# EAGLE board NIRGM V8 _support Double (EAGLE 8.5.1)
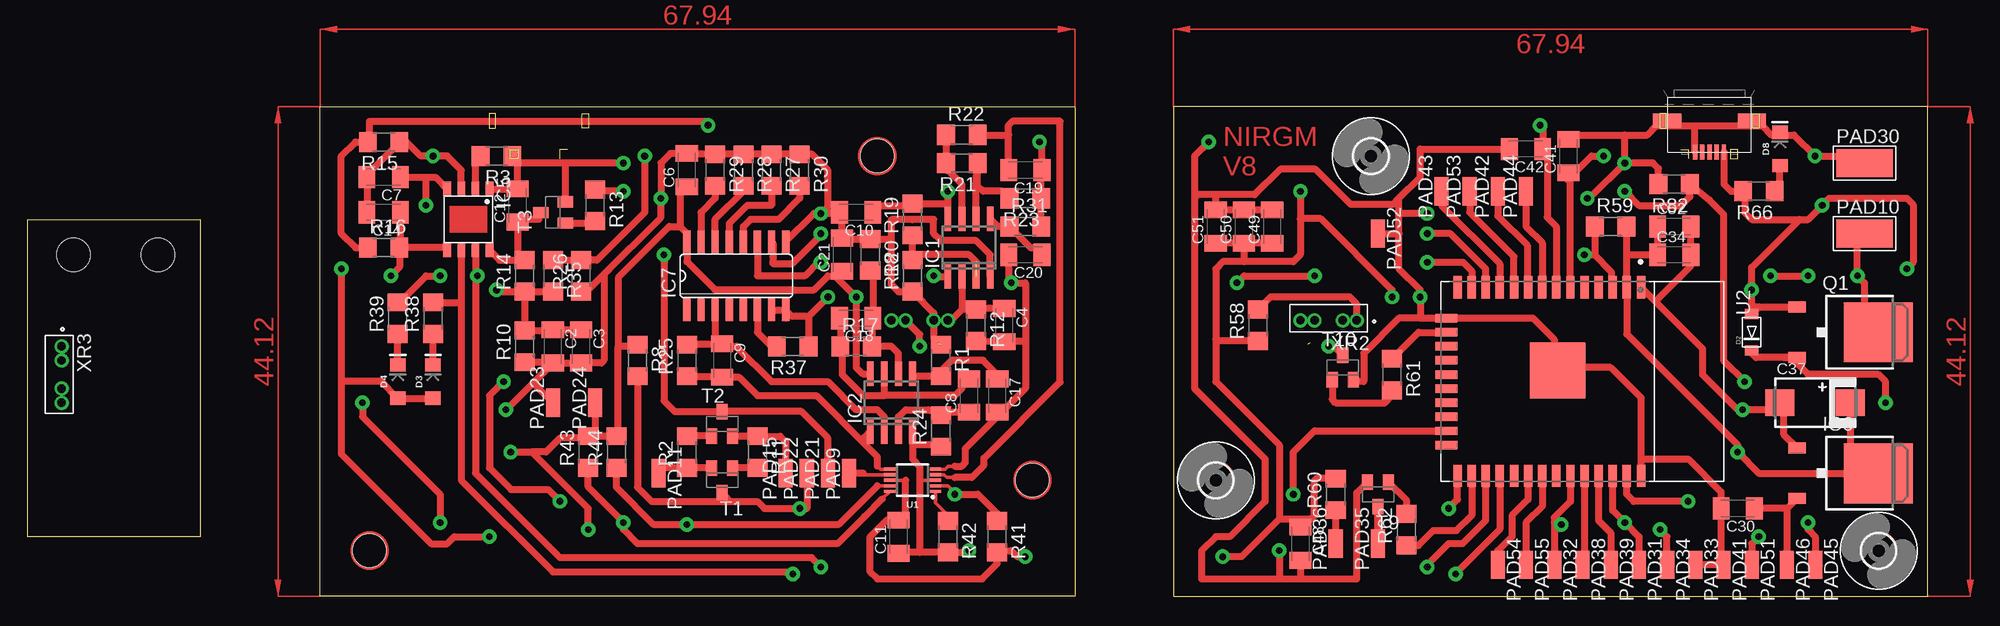
[diagram p0: board, top side]
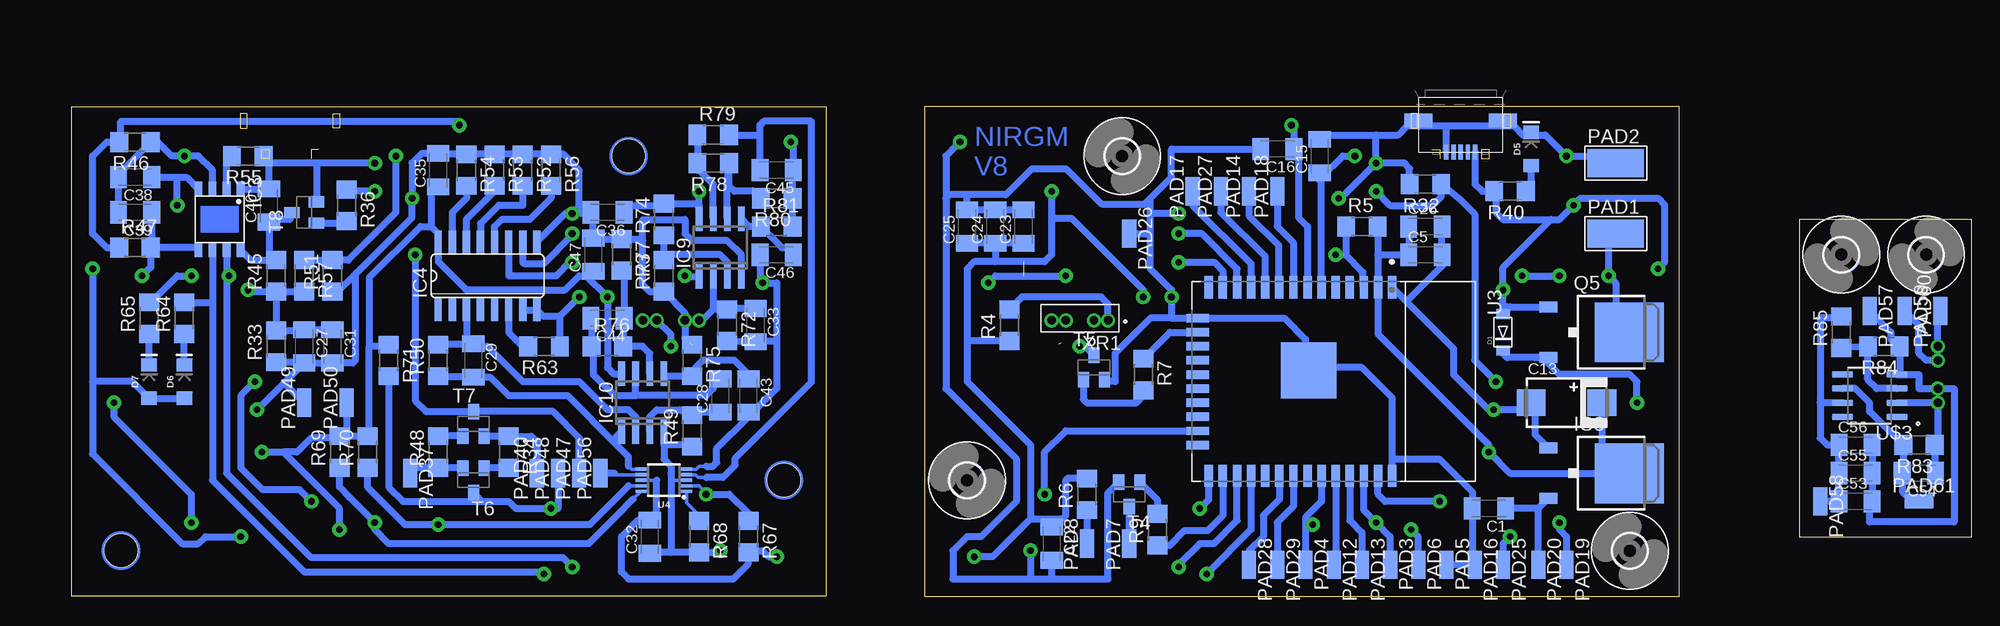
[diagram p1: board, bottom side, seen from below]

Size 171.11 x 44.12 mm. Coordinates in mm from the lower left corner, seen from the top.
Outline: 94.28,44.12 94.28,0 26.35,0 26.35,44.12 94.28,44.12
Outline: 103.17,44.12 103.17,0 171.11,0 171.11,44.12 103.17,44.12
Outline: 15.54,5.38 0,5.38 0,33.95 15.54,33.95 15.54,5.38
Copper layers (1*16): Top 0.035mm / dielectric 1.5mm / Bottom 0.035mm
Design rules "default": minimum track width 6mil, minimum drill 0.35mm, track to track 6mil, track to pad 6mil, pad to pad 6mil, via to via 6mil, smd to smd 6mil, copper to edge 40mil, drill to drill 6mil, minimum pad ring 10mil, minimum via ring 8mil, stop-mask expansion 4mil, vias tented up to drill 0mil, thermal gap 10mil

## Footprints (pad centres in the part's own frame; a part is rotated, then mirrored left to right if it is on the bottom)
C1206K = smd 1.5 x 2: 1 -1.5,0; 2 1.5,0
7343/T = smd 2.6 x 2.4: + 3.175,0; - -3.175,0
SOD-123FL = smd 0.91 x 1.22: A 1.637,0; C -1.637,0
LED-1206 = smd 1.2 x 1.4: A -1.5,0; C 1.5,0
3,0 = hole 3: 0,0
SO08 = smd 0.6 x 2.2: 1 -1.905,-2.6; 2 -0.635,-2.6; 3 0.635,-2.6; 4 1.905,-2.6; 5 1.905,2.6; 6 0.635,2.6; 7 -0.635,2.6; 8 -1.905,2.6
SOP-8 = smd 1.3 x 0.7: 1 -2.75,1.905; 2 -2.75,0.635; 3 -2.75,-0.635; 4 -2.75,-1.905; 5 2.75,-1.905; 6 2.75,-0.635; 7 2.75,0.635; 8 2.75,1.905
SO16 = smd 0.66 x 2.032: 1 -4.445,-3.073; 2 -3.175,-3.073; 3 -1.905,-3.073; 4 -0.635,-3.073; 5 0.635,-3.073; 6 1.905,-3.073; 7 3.175,-3.073; 8 4.445,-3.073; 9 4.445,3.073; 10 3.175,3.073; 11 1.905,3.073; 12 0.635,3.073; 13 -0.635,3.073; 14 -1.905,3.073; 15 -3.175,3.073; 16 -4.445,3.073
TO252 = smd 1 x 1.6: 1 -2.28,-6.07; 2 2.28,-6.07 | smd 5.4 x 6.2: 3 0,1.23
5-2,5 = smd 2.54 x 5.08: 1 0,0
SMD1,27-2,54 = smd 1.27 x 2.54: 1 0,0
TO252' = smd 1 x 1.6: 1 -2.28,-4.8; 2 2.28,-4.8 | smd 5.4 x 6.2: 3 0,2.5
R1206 = smd 1.6 x 1.803: 1 -1.422,0; 2 1.422,0
SOT23 = smd 1 x 1.4: 1 -0.95,-1.1; 2 0.95,-1.1; 3 0,1.1
MSOP10 = smd 0.3 x 1: 1 -1,-2.05; 2 -0.5,-2.05; 3 0,-2.05; 4 0.5,-2.05; 5 1,-2.05; 6 1,2.05; 7 0.5,2.05; 8 0,2.05; 9 -0.5,2.05; 10 -1,2.05
MODULE_ESP32-WROOM-32D = smd 2 x 0.762: 1 -8.5,5.26; 2 -8.5,3.99; 3 -8.5,2.72; 4 -8.5,1.45; 5 -8.5,0.18; 6 -8.5,-1.09; 7 -8.5,-2.36; 8 -8.5,-3.63; 9 -8.5,-4.9; 10 -8.5,-6.17; 11 -8.5,-7.44; 12 -8.5,-8.71; 13 -8.5,-9.98; 14 -8.5,-11.25; 25 8.5,-11.25; 26 8.5,-9.98; 27 8.5,-8.71; 28 8.5,-7.44; 29 8.5,-6.17; 30 8.5,-4.9; 31 8.5,-3.63; 32 8.5,-2.36; 33 8.5,-1.09; 34 8.5,0.18; 35 8.5,1.45; 36 8.5,2.72; 37 8.5,3.99; 38 8.5,5.26 | smd 0.762 x 2: 15 -5.715,-12.25; 16 -4.445,-12.25; 17 -3.175,-12.25; 18 -1.905,-12.25; 19 -0.635,-12.25; 20 0.635,-12.25; 21 1.905,-12.25; 22 3.175,-12.25; 23 4.445,-12.25; 24 5.715,-12.25 | smd 5 x 5: 39 -1,-2.24
47589-0001 = smd 1.35 x 0.4: 1 2.8,1.3; 2 2.8,0.65; 3 2.8,0; 4 2.8,-0.65; 5 2.8,-1.3 | smd 1.27 x 2.54: P$1 0,3.81; P$2 0,-3.81
SOIC127P600X175-8N = smd 1.9 x 0.6: 1 -2.455,1.905; 2 -2.455,0.635; 3 -2.455,-0.635; 4 -2.455,-1.905; 5 2.455,-1.905; 6 2.455,-0.635; 7 2.455,0.635; 8 2.455,1.905
XDCR_TCRT1000 = drill 0.75 pad 1.1: A -2.54,0.2; CATH -1.27,0.2; COLL 2.54,0.2; E 1.27,0.2

## Placement (x,y rotation side)
C1  10uf  [C1206K]  43.48,7.93 180 bottom
C2  100nf  [C1206K]  47.3,22.53 270 top
C3  10uf  [C1206K]  49.83,22.53 270 top
C4  5.7pf  [C1206K]  87.94,24.44 270 top
C5  100nf  [C1206K]  49.2,30.79 0 bottom
C6  100nf  [C1206K]  59.36,38.41 90 top
C7  10uf  [C1206K]  32.05,37.77 180 top
C8  10uf  [C1206K]  84.76,18.09 90 top
C9  100nf  [C1206K]  62.53,21.26 270 top
C10  100nf  [C1206K]  74.6,34.59 180 top
C11  1uf  [C1206K]  78.41,5.38 90 top
C12  10uf  [C1206K]  44.12,35.23 90 top
C13  220uf  [7343/T]  36.5,17.45 0 bottom
C14  10uf  [C1206K]  32.05,34.59 180 top
C15  100nf  [C1206K]  58.73,39.68 90 bottom
C16  100nf  [C1206K]  62.53,40.31 180 bottom
C17  10uf  [C1206K]  87.3,18.09 270 top
C18  100nf  [C1206K]  74.6,25.07 180 top
C19  100nF  [C1206K]  89.84,38.41 180 top
C20  1uF  [C1206K]  89.84,30.79 180 top
C21  100nf  [C1206K]  73.33,30.79 90 top
C22  100nf  [C1206K]  82.85,4.75 270 bottom
C23  100nf  [C1206K]  85.39,33.33 90 bottom
C24  10uf  [C1206K]  87.94,33.33 90 bottom
C25  10uf  [C1206K]  90.47,33.33 90 bottom
C26  10uf  [C1206K]  49.2,33.33 0 bottom
C27  100nf  [C1206K]  150.16,22.53 270 bottom
C28  10uf  [C1206K]  112.7,18.09 90 bottom
C29  100nf  [C1206K]  134.93,21.26 270 bottom
C30  10uf  [C1206K]  153.98,7.93 180 top
C31  10uf  [C1206K]  147.62,22.53 270 bottom
C32  1uf  [C1206K]  119.05,5.38 90 bottom
C33  5.7pf  [C1206K]  109.52,24.44 270 bottom
C34  100nf  [C1206K]  148.26,30.79 0 top
C35  100nf  [C1206K]  138.1,38.41 90 bottom
C36  100nf  [C1206K]  122.86,34.59 180 bottom
C37  220uf  [7343/T]  160.96,17.45 0 top
C38  10uf  [C1206K]  165.4,37.77 180 bottom
C39  10uf  [C1206K]  165.4,34.59 180 bottom
C40  10uf  [C1206K]  153.34,35.23 90 bottom
C41  100nf  [C1206K]  138.74,39.68 90 top
C42  100nf  [C1206K]  134.93,40.31 180 top
C43  10uf  [C1206K]  110.16,18.09 270 bottom
C44  100nf  [C1206K]  122.86,25.07 180 bottom
C45  100nF  [C1206K]  107.62,38.41 180 bottom
C46  1uF  [C1206K]  107.62,30.79 180 bottom
C47  100nf  [C1206K]  124.13,30.79 90 bottom
C48  100nf  [C1206K]  114.61,4.75 270 top
C49  100nf  [C1206K]  112.06,33.33 90 top
C50  10uf  [C1206K]  109.52,33.33 90 top
C51  10uf  [C1206K]  106.98,33.33 90 top
C52  10uf  [C1206K]  148.26,33.33 0 top
C53  100nf  [C1206K]  10.46,8.56 0 bottom
C54  5.7pf  [C1206K]  4.75,11.1 180 bottom
C55  10uF  [C1206K]  10.46,11.1 0 bottom
C56  10uF  [C1206K]  10.46,13.64 0 bottom
D1  SOD4007  [SOD-123FL]  42.22,23.8 90 bottom
D2  SOD4007  [SOD-123FL]  155.25,23.8 90 top
D3  GREEN  [LED-1206]  36.5,19.36 90 top
D4  RED  [LED-1206]  33.32,19.36 90 top
D5  RED  [LED-1206]  39.67,40.31 90 bottom
D6  GREEN  [LED-1206]  160.96,19.36 90 bottom
D7  RED  [LED-1206]  164.13,19.36 90 bottom
D8  RED  [LED-1206]  157.79,40.31 90 top
H1  MOUNT-HOLE3.0  [3,0]  30.78,4.12 270 bottom
H2  MOUNT-HOLE3.0  [3,0]  76.5,39.68 270 bottom
H3  MOUNT-HOLE3.0  [3,0]  90.47,10.46 270 bottom
H4  MOUNT-HOLE3.0  [3,0]  166.68,4.12 270 top
H5  MOUNT-HOLE3.0  [3,0]  106.98,10.46 270 top
H6  MOUNT-HOLE3.0  [3,0]  120.95,39.68 270 top
H7  MOUNT-HOLE3.0  [3,0]  11.73,30.79 0 bottom
H8  MOUNT-HOLE3.0  [3,0]  4.11,30.79 0 bottom
IC1  MCP602SN  [SO08]  84.76,31.42 0 top
IC2  MCP602SN  [SO08]  77.78,17.45 0 top
IC3  TP4056  [SOP-8]  157.79,33.96 270 bottom
IC4  4051D  [SO16]  133.66,28.88 0 bottom
IC5  TP4056  [SOP-8]  39.67,33.96 270 top
IC6  3.3v  [TO252]  165.4,11.1 270 top
IC7  4051D  [SO16]  63.8,28.88 0 top
IC8  3.3v  [TO252]  32.05,11.1 270 bottom
IC9  MCP602SN  [SO08]  112.7,31.42 0 bottom
IC10  MCP602SN  [SO08]  119.69,17.45 0 bottom
PAD1  [5-2,5]  32.05,32.69 270 bottom
PAD2  [5-2,5]  32.05,39.04 270 bottom
PAD3  [SMD1,27-2,54]  52.38,2.84 180 bottom
PAD4  [SMD1,27-2,54]  59.99,2.84 180 bottom
PAD5  [SMD1,27-2,54]  47.3,2.84 180 bottom
PAD6  [SMD1,27-2,54]  49.83,2.84 180 bottom
PAD7  [SMD1,27-2,54]  75.87,4.75 0 bottom
PAD8  [SMD1,27-2,54]  79.68,4.75 0 bottom
PAD9  [SMD1,27-2,54]  73.97,11.1 0 top
PAD10  [5-2,5]  165.4,32.69 270 top
PAD11  [SMD1,27-2,54]  56.82,11.1 180 top
PAD12  [SMD1,27-2,54]  57.45,2.84 180 bottom
PAD13  [SMD1,27-2,54]  54.91,2.84 180 bottom
PAD14  [SMD1,27-2,54]  65.07,36.5 0 bottom
PAD15  [SMD1,27-2,54]  68.25,11.1 0 top
PAD16  [SMD1,27-2,54]  44.75,2.84 180 bottom
PAD17  [SMD1,27-2,54]  70.16,36.5 0 bottom
PAD18  [SMD1,27-2,54]  62.53,36.5 0 bottom
PAD19  [SMD1,27-2,54]  36.5,2.84 180 bottom
PAD20  [SMD1,27-2,54]  39.04,2.84 180 bottom
PAD21  [SMD1,27-2,54]  72.06,11.1 0 top
PAD22  [SMD1,27-2,54]  70.16,11.1 0 top
PAD23  [SMD1,27-2,54]  47.3,17.45 0 top
PAD24  [SMD1,27-2,54]  51.1,17.45 0 top
PAD25  [SMD1,27-2,54]  42.22,2.84 180 bottom
PAD26  [SMD1,27-2,54]  75.87,32.69 180 bottom
PAD27  [SMD1,27-2,54]  67.61,36.5 0 bottom
PAD28  [SMD1,27-2,54]  65.07,2.84 180 bottom
PAD29  [SMD1,27-2,54]  62.53,2.84 180 bottom
PAD30  [5-2,5]  165.4,39.04 270 top
PAD31  [SMD1,27-2,54]  145.08,2.84 180 top
PAD32  [SMD1,27-2,54]  137.47,2.84 180 top
PAD33  [SMD1,27-2,54]  150.16,2.84 180 top
PAD34  [SMD1,27-2,54]  147.62,2.84 180 top
PAD35  [SMD1,27-2,54]  121.59,4.75 0 top
PAD36  [SMD1,27-2,54]  117.78,4.75 0 top
PAD37  [SMD1,27-2,54]  140.64,11.1 180 bottom
PAD38  [SMD1,27-2,54]  140,2.84 180 top
PAD39  [SMD1,27-2,54]  142.55,2.84 180 top
PAD40  [SMD1,27-2,54]  129.21,11.1 0 bottom
PAD41  [SMD1,27-2,54]  152.7,2.84 180 top
PAD42  [SMD1,27-2,54]  132.38,36.5 0 top
PAD43  [SMD1,27-2,54]  127.3,36.5 0 top
PAD44  [SMD1,27-2,54]  134.93,36.5 0 top
PAD45  [SMD1,27-2,54]  160.96,2.84 180 top
PAD46  [SMD1,27-2,54]  158.42,2.84 180 top
PAD47  [SMD1,27-2,54]  125.4,11.1 0 bottom
PAD48  [SMD1,27-2,54]  127.3,11.1 0 bottom
PAD49  [SMD1,27-2,54]  150.16,17.45 0 bottom
PAD50  [SMD1,27-2,54]  146.36,17.45 0 bottom
PAD51  [SMD1,27-2,54]  155.25,2.84 180 top
PAD52  [SMD1,27-2,54]  121.59,32.69 180 top
PAD53  [SMD1,27-2,54]  129.84,36.5 0 top
PAD54  [SMD1,27-2,54]  132.38,2.84 180 top
PAD55  [SMD1,27-2,54]  134.93,2.84 180 top
PAD56  [SMD1,27-2,54]  123.5,11.1 0 bottom
PAD57  [SMD1,27-2,54]  9.19,25.71 180 bottom
PAD58  [SMD1,27-2,54]  13.64,8.56 180 bottom
PAD59  [SMD1,27-2,54]  6.02,25.71 180 bottom
PAD60  [SMD1,27-2,54]  2.84,25.71 0 bottom
PAD61  [SMD1,27-2,54]  4.75,8.56 270 bottom
Q1  ME12P04  [TO252']  164.13,23.8 270 top
Q5  ME12P04  [TO252']  33.32,23.8 270 bottom
R1  100k  [R1206]  82.22,21.26 270 top
R2  10k  [R1206]  59.36,13.01 90 top
R3  2.2k  [R1206]  42.22,39.68 180 top
R4  20R  [R1206]  86.66,24.44 90 bottom
R5  10k  [R1206]  54.91,33.33 0 bottom
R6  20R  [R1206]  79.68,9.2 90 bottom
R7  1k  [R1206]  74.6,19.99 270 bottom
R8  10k  [R1206]  54.91,21.26 270 top
R9  1k  [R1206]  73.33,6.02 90 bottom
R10  10k  [R1206]  44.75,22.53 90 top
R11  10k  [R1206]  65.71,13.01 270 top
R12  1M  [R1206]  85.39,24.44 270 top
R13  1k  [R1206]  51.1,35.23 270 top
R14  10k  [R1206]  44.75,28.88 90 top
R15  47k  [R1206]  32.05,40.95 180 top
R16  47k  [R1206]  32.05,31.42 0 top
R17  100k  [R1206]  74.6,22.53 0 top
R18  10k  [R1206]  79.68,28.88 90 top
R19  100k  [R1206]  79.68,33.96 90 top
R20  10k  [R1206]  75.87,30.79 270 top
R21  57k  [R1206]  84.12,39.04 180 top
R22  200k  [R1206]  84.12,41.58 0 top
R23  1k  [R1206]  89.84,35.87 180 top
R24  10k  [R1206]  82.22,14.91 90 top
R25  220k  [R1206]  59.36,21.26 90 top
R26  47k  [R1206]  49.83,28.88 90 top
R27  1k  [R1206]  66.98,38.41 270 top
R28  4.7k  [R1206]  64.44,38.41 270 top
R29  10k  [R1206]  61.9,38.41 270 top
R30  47k  [R1206]  69.52,38.41 270 top
R31  2.2M  [R1206]  89.84,33.33 0 top
R32  4.7k  [R1206]  49.2,37.14 180 bottom
R33  10k  [R1206]  152.7,22.53 90 bottom
R34  10k  [R1206]  131.75,13.01 270 bottom
R35  47k  [R1206]  47.3,28.88 270 top
R36  1k  [R1206]  146.36,35.23 270 bottom
R37  10k  [R1206]  68.88,22.53 180 top
R38  1k  [R1206]  36.5,25.07 90 top
R39  1k  [R1206]  33.32,25.07 90 top
R40  1k  [R1206]  41.58,36.5 180 bottom
R41  10k  [R1206]  87.3,5.38 270 top
R42  10k  [R1206]  82.85,5.38 270 top
R43  10k  [R1206]  50.47,13.01 90 top
R44  10k  [R1206]  53.01,13.01 90 top
R45  10k  [R1206]  152.7,28.88 90 bottom
R46  47k  [R1206]  165.4,40.95 180 bottom
R47  47k  [R1206]  165.4,31.42 0 bottom
R48  10k  [R1206]  138.1,13.01 90 bottom
R49  10k  [R1206]  115.24,14.91 90 bottom
R50  220k  [R1206]  138.1,21.26 90 bottom
R51  47k  [R1206]  147.62,28.88 90 bottom
R52  1k  [R1206]  130.48,38.41 270 bottom
R53  4.7k  [R1206]  133.02,38.41 270 bottom
R54  10k  [R1206]  135.56,38.41 270 bottom
R55  2.2k  [R1206]  155.25,39.68 180 bottom
R56  47k  [R1206]  127.94,38.41 270 bottom
R57  47k  [R1206]  150.16,28.88 270 bottom
R58  20R  [R1206]  110.8,24.44 90 top
R59  10k  [R1206]  142.55,33.33 0 top
R60  20R  [R1206]  117.78,9.2 90 top
R61  1k  [R1206]  122.86,19.99 270 top
R62  1k  [R1206]  124.13,6.02 90 top
R63  10k  [R1206]  128.57,22.53 180 bottom
R64  1k  [R1206]  160.96,25.07 90 bottom
R65  1k  [R1206]  164.13,25.07 90 bottom
R66  1k  [R1206]  155.88,36.5 180 top
R67  10k  [R1206]  110.16,5.38 270 bottom
R68  10k  [R1206]  114.61,5.38 270 bottom
R69  10k  [R1206]  146.99,13.01 90 bottom
R70  10k  [R1206]  144.45,13.01 90 bottom
R71  10k  [R1206]  142.55,21.26 270 bottom
R72  1M  [R1206]  112.06,24.44 270 bottom
R73  10k  [R1206]  117.78,28.88 90 bottom
R74  100k  [R1206]  117.78,33.96 90 bottom
R75  100k  [R1206]  115.24,21.26 270 bottom
R76  100k  [R1206]  122.86,22.53 0 bottom
R77  10k  [R1206]  121.59,30.79 270 bottom
R78  57k  [R1206]  113.33,39.04 180 bottom
R79  200k  [R1206]  113.33,41.58 0 bottom
R80  1k  [R1206]  107.62,35.87 180 bottom
R81  2.2M  [R1206]  107.62,33.33 0 bottom
R82  4.7k  [R1206]  148.26,37.14 180 top
R83  100k  [R1206]  4.75,13.64 180 bottom
R84  10k  [R1206]  7.92,22.53 180 bottom
R85  100k  [R1206]  11.73,23.8 90 bottom
T1  BC850  [SOT23]  62.53,10.46 180 top
T2  BC850  [SOT23]  62.53,15.54 0 top
T3  BC850  [SOT23]  47.3,34.59 90 top
T4  BC850  [SOT23]  75.87,9.2 180 bottom
T5  BC850  [SOT23]  79.05,20.62 0 bottom
T6  BC850  [SOT23]  134.93,10.46 180 bottom
T7  BC850  [SOT23]  134.93,15.54 0 bottom
T8  BC850  [SOT23]  150.16,34.59 90 bottom
T9  BC850  [SOT23]  121.59,9.2 180 top
T10  BC850  [SOT23]  118.41,20.62 0 top
U1  ADS1015  [MSOP10]  79.68,10.46 90 top
U2  ESP32-WROOM-32D  [MODULE_ESP32-WROOM-32D]  140,19.36 270 top
U3  ESP32-WROOM-32D  [MODULE_ESP32-WROOM-32D]  57.45,19.36 270 bottom
U4  ADS1015  [MSOP10]  117.78,10.46 90 bottom
U$1  MICRO-USB  [47589-0001]  46.02,42.85 270 bottom
U$2  MICRO-USB  [47589-0001]  151.44,42.85 270 top
U$3  MCP6021-E/SN  [SOIC127P600X175-8N]  9.19,18.09 180 bottom
XR1  TCRT1000  [XDCR_TCRT1000]  80.31,25.07 180 bottom
XR2  TCRT1000  [XDCR_TCRT1000]  117.14,25.07 180 top
XR3  TCRT1000  [XDCR_TCRT1000]  2.84,19.99 270 top

## Library data of the parts
C1-C12 C14-C36 C38-C56 = rcl; SPICEPREFIX: C
C13 C37 = cap-master
D1 D2 = adafruit
D3-D8 = SparkFun-LED; PROD_ID: DIO-00862
H1-H8 = holes
IC1 IC2 IC9 IC10 = linear
IC3 IC5 = TP4056
IC4 IC7 = 40xx
IC6 IC8 = v-reg-2
PAD1-PAD61 = wirepad
Q1 Q5 = transistor-fet
R1-R85 = rcl; SPICEPREFIX: R
T1-T10 = transistor
U1 U4 = SparkFun-IC-Conversion; PROD_ID: IC-12270
U2 U3 = ESP32-WROOM-32DMODED; AVAILABILITY: Unavailable; DESCRIPTION: IC: SoC; GPIO, I2C, I2S, IR, SD, SDIO, SPI, UART; 2.7÷3.6VDC; 20dBm; MF: Espressif Systems; MP: ESP32-WROOM-32D; PACKAGE: Module Espressif Systems; PRICE: None
U$1 U$2 = con-molex-usb
U$3 = MCP6021-E_SN; AVAILABILITY: Unavailable; DESCRIPTION: MCP6021 Series 5.5 V 10 MHz Rail-to-Rail I/O Operational Amplifier-SOIC-8; MF: Microchip; MP: MCP6021-E/SN; PACKAGE: SOIC-8 Microchip; PRICE: None
XR1-XR3 = TCRT1000; AVAILABILITY: Unavailable; DESCRIPTION: 950 nm 50 mA Through Hole Reflective Optical Sensor with Transistor Output; MF: Vishay; MP: TCRT1000; PACKAGE: PCB Mount Vishay; PRICE: None

## Nets
3.3V: C5.1 C6.1 C10.1 C11.2 C13.+ C21.1 C22.1 C23.1 C24.1 C25.1 C26.1 IC1.8 IC2.8 IC7.16 IC8.3 PAD6.1 PAD24.1 R4.1 R5.2 R6.2 R8.1 R19.2 R41.2 R43.2 R44.2 U1.8 U3.2
3.3V1: C32.2 C34.1 C35.1 C36.1 C37.+ C47.1 C48.1 C49.1 C50.1 C51.1 C52.1 IC4.16 IC6.3 IC9.8 IC10.8 PAD34.1 PAD50.1 R58.1 R59.2 R60.2 R67.2 R69.2 R70.2 R71.1 R74.2 U2.2 U4.8
3.3V2: C53.1 C55.1 C56.1 PAD58.1 R85.2 U$3.7
ADS_COMP: R41.1 U1.2 U3.23
ADS_COMP1: R67.1 U2.23 U4.2
CH_RX: PAD12.1 U3.34
CH_RX1: PAD38.1 U2.34
CH_TX: PAD13.1 U3.35
CH_TX1: PAD39.1 U2.35
CHARGE_DISABLE: R13.1 R32.1 U3.37
CHARGE_DISABLE1: R36.1 R82.1 U2.37
CHARGE_E: C12.1 IC5.8 R14.2 T3.3
CHARGE_E1: C40.1 IC3.8 R45.2 T8.3
CHARGED_LOW: IC5.6 R38.2 U3.28
CHARGED_LOW1: IC3.6 R64.2 U2.28
CHARGING_LOW: IC5.7 R39.2 U3.27
CHARGING_LOW1: IC3.7 R65.2 U2.27
CHP_EN: PAD21.1 R5.1 T2.3 U3.3
CHP_EN1: PAD47.1 R59.1 T7.3 U2.3
DTR: PAD11.1 R2.1 T1.2
DTR1: PAD37.1 R48.1 T6.2
EN_IR1: R9.1 U3.26
EN_IR2: R7.1 U3.16
EN_IR3: R62.1 U2.26
EN_IR4: R61.1 U2.16
GND: C1.2 C2.2 C3.2 C5.2 C6.2 C7.2 C10.2 C11.1 C12.2 C13.- C14.2 C15.2 C16.2 C19.1 C21.2 C22.2 C23.2 C24.2 C25.2 C26.2 D5.C IC1.4 IC2.4 IC5.1 IC5.3 IC7.7 IC7.8 IC7.9 IC8.1 PAD2.1 PAD5.1 PAD16.1 PAD23.1 PAD26.1 R1.1 R3.1 R10.1 R15.1 R18.1 R20.1 R23.1 R24.1 R26.1 R27.1 R28.1 R29.1 R30.1 R31.2 R32.2 R37.1 R42.2 T3.2 T4.2 T5.2 U1.3 U3.1 U3.15 U3.38 U3.39 U$1.5 XR1.E
GND1: C27.2 C30.2 C31.2 C32.1 C34.2 C35.2 C36.2 C37.- C38.2 C39.2 C40.2 C41.2 C42.2 C45.1 C47.2 C48.2 C49.2 C50.2 C51.2 C52.2 D8.C IC3.1 IC3.3 IC4.7 IC4.8 IC4.9 IC6.1 IC9.4 IC10.4 PAD30.1 PAD33.1 PAD41.1 PAD49.1 PAD52.1 R33.1 R46.1 R49.1 R51.1 R52.1 R53.1 R54.1 R55.1 R56.1 R63.1 R68.2 R73.1 R75.1 R77.1 R80.1 R81.2 R82.2 T8.2 T9.2 T10.2 U2.1 U2.15 U2.38 U2.39 U4.3 U$2.5 XR2.E
GND2: C53.2 C55.2 C56.2 PAD57.1 R84.1 U$3.4 XR3.E
IO0: PAD22.1 R8.2 T1.3 U3.25
IO1: PAD44.1 U2.8
IO2: PAD42.1 U2.9
IO3: PAD48.1 R71.2 T6.3 U2.25
IO4: PAD43.1 U2.11
IO5: PAD55.1 U2.31
IO6: PAD54.1 U2.30
IO7: PAD53.1 U2.10
IO18: PAD28.1 U3.30
IO19: PAD29.1 U3.31
IO25: PAD27.1 U3.10
IO26: PAD17.1 U3.11
IO32: PAD18.1 U3.8
IO33: PAD14.1 U3.9
IR1_LED_ANODE: PAD8.1 R6.1
IR1_LED_ANODE1: PAD36.1 R60.1
IR1_LED_ANODE2: PAD60.1 XR3.A
IR1_LED_CATHODE: PAD7.1 T4.3
IR1_LED_CATHODE1: PAD35.1 T9.3
IR1_LED_CATHODE2: PAD59.1 XR3.CATH
IR2_LED_ANODE: R4.2 XR1.A
IR2_LED_ANODE1: R58.2 XR2.A
IR2_LED_CATHODE: T5.3 XR1.CATH
IR2_LED_CATHODE1: T10.3 XR2.CATH
N$1: D5.A R40.1
N$2: D4.C R39.1
N$3: R7.2 T5.1
N$4: D3.C R38.1
N$5: R11.2 T1.1
N$6: C17.1 IC2.5 R1.2
N$7: R36.2 T8.1
N$8: R9.2 T4.1
N$9: R42.1 U1.1
N$10: IC1.3 R18.2 R19.1
N$11: IC7.6 R37.2
N$12: C8.2 C18.2 IC2.7 R17.1
N$13: R13.2 T3.1
N$14: C18.1 IC2.6 R17.2 R20.2
N$15: IC1.6 R21.1 R23.2
N$16: C20.1 IC1.5 R31.1
N$17: IC1.7 R21.2 R22.1
N$18: R2.2 T2.1
N$19: R34.2 T6.1
N$20: R48.2 T7.1
N$21: C28.1 IC10.3 R49.2
N$22: U3.29
N$23: C29.1 IC4.3 IC10.2 R50.2
N$24: IC4.13 R52.2
N$25: IC4.14 R53.2
N$26: IC4.15 R54.2
N$27: IC4.12 R56.2
N$28: IC4.6 R63.2
N$29: C8.1 IC2.3 R24.2
N$30: D8.A R66.1
N$31: R68.1 U4.1
N$32: R62.2 T9.1
N$33: R61.2 T10.1
N$34: IC9.3 R73.2 R74.1
N$35: D7.C R65.1
N$36: D6.C R64.1
N$37: C43.1 IC10.5 R75.2
N$38: C28.2 C44.2 IC10.7 R76.1
N$39: C9.1 IC2.2 IC7.3 R25.2
N$40: IC7.13 R27.2
N$41: IC7.14 R28.2
N$42: IC7.15 R29.2
N$43: IC7.12 R30.2
N$44: C44.1 IC10.6 R76.2 R77.2
N$45: IC9.6 R78.1 R80.2
N$46: C46.1 IC9.5 R81.1
N$47: IC9.7 R78.2 R79.1
N$48: U2.29
N$49: R84.2 R85.1 U$3.3
PHOTO_TRANS_COLLECTOR: C4.1 IC1.2 R12.1 XR1.COLL
PHOTO_TRANS_COLLECTOR1: C33.1 IC9.2 R72.1 XR2.COLL
PHOTO_TRANS_COLLECTOR2: C54.1 R83.1 U$3.2 XR3.COLL
PHOTODIODE_1_ADC: C4.2 C17.2 C20.2 IC1.1 R12.2 U1.5
PHOTODIODE_1_ADC1: C33.2 C43.2 C46.2 IC9.1 R72.2 U4.5
PHOTODIODE_2_ADC: PAD9.1 U1.7
PHOTODIODE_2_ADC1: PAD56.1 U4.7
PHOTODIODE_2_ADC2: C54.2 PAD61.1 R83.2 U$3.6
PPG_SIGNAL_1_ADC: C9.2 IC2.1 R25.1 U1.6
PPG_SIGNAL_1_ADC1: C29.2 IC10.1 R50.1 U4.6
PPG_SIGNAL_2_ADC: C19.2 R22.2 U1.4
PPG_SIGNAL_2_ADC1: C45.2 R79.2 U4.4
PPG_SIGNAL_GAIN_A: IC7.11 U3.13
PPG_SIGNAL_GAIN_A1: IC4.11 U2.13
PPG_SIGNAL_GAIN_B: IC7.10 U3.12
PPG_SIGNAL_GAIN_B1: IC4.10 U2.12
R_PROG: IC5.2 R3.2
R_PROG1: IC3.2 R55.2
RTS: PAD15.1 R11.1 T2.2
RTS1: PAD40.1 R34.1 T7.2
SCL: PAD3.1 R43.1 U1.10 U3.36
SCL1: PAD31.1 R69.1 U2.36 U4.10
SDA: PAD4.1 R44.1 U1.9 U3.33
SDA1: PAD32.1 R70.1 U2.33 U4.9
V_BATT: C14.1 IC5.5 PAD1.1 Q5.3 R16.2
V_BATT1: C39.1 IC3.5 PAD10.1 Q1.3 R47.2
V_BATT_ADC: C16.1 R15.2 R16.1 U3.7
V_BATT_ADC1: C42.1 R46.2 R47.1 U2.7
V_USB: C2.1 C3.1 C7.1 D1.A D3.A D4.A IC5.4 PAD25.1 Q5.1 R10.2 R14.1 R35.2 R40.2 U$1.1
V_USB1: C27.1 C31.1 C38.1 D2.A D6.A D7.A IC3.4 PAD51.1 Q1.1 R33.2 R45.1 R57.2 R66.2 U$2.1
V_USB_ADC: C15.1 R26.2 R35.1 U3.6
V_USB_ADC1: C41.1 R51.2 R57.1 U2.6
VIN: C1.1 IC8.2 PAD20.1
VIN1: C30.1 IC6.2 PAD46.1
VIN_SW: D1.C PAD19.1 Q5.2
VIN_SW1: D2.C PAD45.1 Q1.2

## Tracks (layer width: path | path; a pad name or v marks a point on that pad's centre or on a via)
3.3V  (via drill 0.6 pad 1.3)
  Top 0.305: 79.05,10.46 U1.8
  Top 0.61: v43.48,13.01 45.39,13.01 | v50.47,6.02 50.47,7.93 45.39,13.01 | 51.1,14.43 R44.2 53.16,14.58 53.16,22.53 | 51.1,14.43 R43.2 50.32,14.28 47.93,14.28 46.66,13.01 45.39,13.01 | 79.05,10.46 79.05,7.52 C11.2 77.37,6.88 75.87,5.38 75.87,2.21 76.5,1.57 85.94,1.57 87.3,2.94 R41.2 87.45,4.12 88.57,4.12 89.11,3.57 v89.84,3.57 | 58.73,33.33 57.77,33.33 53.16,28.73 53.16,22.53 | C6.1 58.73,36.27 58.73,33.33 | R8.1 54.76,22.53 53.16,22.53 | PAD24.1 51.1,14.43 | 58.73,33.33 59.36,32.69 IC7.16 59.36,30.15 61.88,27.64 68.92,27.64 68.94,27.61 70.79,27.61 72.06,28.88 72.69,28.88 | IC2.8 75.17,20.05 74.6,20.62 v74.6,26.98 72.69,28.88 | IC1.8 82.85,35.23 | 82.85,35.23 v82.85,36.5 | C21.1 73.1,29.29 72.69,28.88 | C10.1 76.73,35.23 79.53,35.23 R19.2 82.7,35.38 82.85,35.23
  Bottom 0.61: IC8.3 41.58,11.1 v43.48,13.01 43.48,13.64 53.47,23.62 U3.2 53.49,27.88 53.49,30.79 | IC8.3 31.19,12.01 | R5.2 53.49,30.79 | 53.49,30.79 C5.1 C26.1 | C13.+ 33.32,12.37 32.09,11.14 IC8.3 | 80.47,10.62 R6.2 81.43,10.62 81.59,10.46 81.59,7.29 81.9,6.97 82.85,6.97 | v74.6,26.98 74.6,27.61 81.02,34.03 IC1.8 | 90.47,23.17 90.47,29.52 89.84,30.15 87.94,30.15 | 90.47,23.17 90.47,19.36 84.76,13.64 84.76,6.97 | 84.76,6.97 82.85,6.97 | 84.76,6.97 88.16,3.57 v89.84,3.57 | C22.1 82.85,6.97 | v82.85,36.5 IC1.8 | IC1.8 82.85,30.79 83.49,30.15 87.94,30.15 | C23.1 C24.1 | C24.1 C25.1 | C24.1 87.94,30.15 | PAD6.1 49.83,5.38 v50.47,6.02 | R4.1 90.32,23.01 90.47,23.17
3.3V1  (via drill 0.6 pad 1.3)
  Top 0.61: IC6.3 155.88,11.1 v153.98,13.01 153.98,13.64 144,23.62 U2.2 143.97,27.88 143.97,30.79 | IC6.3 166.27,12.01 | R59.2 143.97,30.79 | 143.97,30.79 C34.1 C52.1 | C37.+ 164.13,12.37 165.37,11.14 IC6.3 | 116.99,10.62 R60.2 116.03,10.62 115.88,10.46 115.88,7.29 115.56,6.97 114.61,6.97 | v122.86,26.98 122.86,27.61 116.44,34.03 IC9.8 | 106.98,23.17 106.98,29.52 107.62,30.15 109.52,30.15 | 106.98,23.17 106.98,19.36 112.7,13.64 112.7,6.97 | 112.7,6.97 114.61,6.97 | 112.7,6.97 109.3,3.57 v107.62,3.57 | C48.1 114.61,6.97 | v114.61,36.5 IC9.8 | IC9.8 114.61,30.79 113.97,30.15 109.52,30.15 | C49.1 C50.1 | C50.1 C51.1 | C50.1 109.52,30.15 | PAD34.1 147.62,5.38 v146.99,6.02 | R58.1 107.14,23.01 106.98,23.17
  Bottom 0.305: 118.41,10.46 U4.8
  Bottom 0.61: v153.98,13.01 152.07,13.01 | v146.99,6.02 146.99,7.93 152.07,13.01 | 146.36,14.43 R70.2 144.3,14.58 144.3,22.53 | 146.36,14.43 R69.2 147.14,14.28 149.53,14.28 150.8,13.01 152.07,13.01 | 118.41,10.46 118.41,7.52 C32.2 120.09,6.88 121.59,5.38 121.59,2.21 120.95,1.57 111.52,1.57 110.16,2.94 R67.2 110.01,4.12 108.89,4.12 108.35,3.57 v107.62,3.57 | 138.74,33.33 139.69,33.33 144.3,28.73 144.3,22.53 | C35.1 138.74,36.27 138.74,33.33 | R71.1 142.7,22.53 144.3,22.53 | PAD50.1 146.36,14.43 | 138.74,33.33 138.1,32.69 IC4.16 138.1,30.15 135.58,27.64 128.54,27.64 128.52,27.61 126.67,27.61 125.4,28.88 124.77,28.88 | IC10.8 122.28,20.05 122.86,20.62 v122.86,26.98 124.77,28.88 | IC9.8 114.61,35.23 | 114.61,35.23 v114.61,36.5 | C47.1 124.36,29.29 124.77,28.88 | C36.1 120.72,35.23 117.93,35.23 R74.2 114.76,35.38 114.61,35.23
3.3V2
  Bottom 0.61: U$3.7 13.64,17.45 | 13.64,17.45 13.64,14.28 13,13.64 C56.1 C55.1 C53.1 PAD58.1 | R85.2 11.89,25.07 13.64,25.07 13.64,17.45
ADS_COMP  (via drill 0.6 pad 1.3)
  Top 0.305: U1.2 82.85,9.96 83.49,9.33 v83.49,9.2
  Top 0.61: v83.49,9.2 85.57,9.2 87.3,7.46 R41.1
  Bottom 0.61: v83.49,9.2 83.49,13.01 81.59,14.91 U3.23
ADS_COMP1  (via drill 0.6 pad 1.3)
  Top 0.61: v113.97,9.2 113.97,13.01 115.88,14.91 U2.23
  Bottom 0.305: U4.2 114.61,9.96 113.97,9.33 v113.97,9.2
  Bottom 0.61: v113.97,9.2 111.89,9.2 110.16,7.46 R67.1
CH_RX
  Bottom 0.61: PAD12.1 57.27,3.02 U3.34
CH_RX1
  Top 0.61: PAD38.1 140.19,3.02 U2.34
CH_TX
  Bottom 0.61: U3.35 56,6.83 54.91,5.75 PAD13.1
CH_TX1
  Top 0.61: U2.35 141.45,6.83 142.55,5.75 PAD39.1
CHARGE_DISABLE  (via drill 0.6 pad 1.3)
  Top 0.61: v53.64,36.5 51.1,36.5 R13.1 | v47.93,8.56 46.85,9.64 43.51,9.64 41.58,11.57 41.58,18.09 v42.85,19.36
  Bottom 0.61: v42.85,19.36 44.75,21.26 44.75,34.44 46.02,35.71 R32.1 47.78,36.02 48.56,35.23 52.38,35.23 v53.64,36.5 | U3.37 53.47,9.2 52.83,8.56 v47.93,8.56
CHARGE_DISABLE1  (via drill 0.6 pad 1.3)
  Top 0.61: v154.61,19.36 152.7,21.26 152.7,34.44 151.44,35.71 R82.1 149.68,36.02 148.89,35.23 145.08,35.23 v143.81,36.5 | U2.37 144,9.2 144.63,8.56 v149.53,8.56
  Bottom 0.61: v143.81,36.5 146.36,36.5 R36.1 | v149.53,8.56 150.61,9.64 153.95,9.64 155.88,11.57 155.88,18.09 v154.61,19.36
CHARGE_E
  Top 0.61: IC5.8 42.49,30.3 44.12,30.3 | 44.12,30.3 R14.2 | 44.12,30.3 C12.1 44.35,33.96 46.02,33.96 46.02,34.43 T3.3
CHARGE_E1
  Bottom 0.61: IC3.8 154.97,30.3 153.34,30.3 | 153.34,30.3 R45.2 | 153.34,30.3 C40.1 153.11,33.96 151.44,33.96 151.44,34.43 T8.3
CHARGED_LOW  (via drill 0.6 pad 1.3)
  Top 0.61: IC5.6 39.04,26.34 | 39.04,26.34 39.04,10.46 47.3,2.21 68.69,2.21 v68.88,2.02 | R38.2 38.89,26.49 39.04,26.34
  Bottom 0.61: U3.28 64.89,6.02 v68.88,2.03 v68.88,2.02
CHARGED_LOW1  (via drill 0.6 pad 1.3)
  Top 0.61: U2.28 132.56,6.02 v128.57,2.03 v128.57,2.02
  Bottom 0.61: IC3.6 158.42,26.34 | 158.42,26.34 158.42,10.46 150.16,2.21 128.77,2.21 v128.57,2.02 | R64.2 158.57,26.49 158.42,26.34
CHARGING_LOW  (via drill 0.6 pad 1.3)
  Top 0.61: IC5.7 40.31,28.88 | 40.31,28.88 v40.5,28.88 | v37.13,28.88 35.86,28.88 33.48,26.49 R39.2 | 40.31,28.88 40.31,11.1 47.93,3.48 70.6,3.48 v71.42,2.65
  Bottom 0.61: v40.5,28.88 v37.13,28.88 | U3.27 66.16,6.83 68.25,4.75 69.52,4.75 71.42,2.84 v71.42,2.65
CHARGING_LOW1  (via drill 0.6 pad 1.3)
  Top 0.61: v156.96,28.88 v160.32,28.88 | U2.27 131.3,6.83 129.21,4.75 127.94,4.75 126.03,2.84 v126.03,2.65
  Bottom 0.61: IC3.7 157.15,28.88 | 157.15,28.88 v156.96,28.88 | v160.32,28.88 161.59,28.88 163.98,26.49 R65.2 | 157.15,28.88 157.15,11.1 149.53,3.48 126.86,3.48 v126.03,2.65
CHP_EN  (via drill 0.6 pad 1.3)
  Top 0.61: v57.28,30.79 57.28,17.62 58.26,16.65 T2.3 69.69,16.65 72.06,14.28 PAD21.1
  Bottom 0.61: U3.3 54.81,27.93 54.81,29.19 56.41,30.79 | v57.28,30.79 56.41,30.79 | R5.1 56.34,30.85 56.41,30.79
CHP_EN1  (via drill 0.6 pad 1.3)
  Top 0.61: U2.3 142.65,27.93 142.65,29.19 141.06,30.79 | v140.18,30.79 141.06,30.79 | R59.1 141.12,30.85 141.06,30.79
  Bottom 0.61: v140.18,30.79 140.18,17.62 139.2,16.65 T7.3 127.77,16.65 125.4,14.28 PAD47.1
DTR
  Top 0.61: T1.2 59.38,11.56 R2.1 56.97,11.58 PAD11.1
DTR1
  Bottom 0.61: T6.2 138.08,11.56 R48.1 140.49,11.58 PAD37.1
EN_IR1
  Bottom 0.61: U3.26 67.44,7.29 68.8,5.93 70.88,5.93 72.21,4.6 R9.1
EN_IR2
  Bottom 0.61: R7.1 72.21,23.8 U3.16
EN_IR3
  Top 0.61: U2.26 130.02,7.29 128.66,5.93 126.58,5.93 125.25,4.6 R62.1
EN_IR4
  Top 0.61: R61.1 125.25,23.8 U2.16
GND  (via drill 0.6 pad 1.3)  (1 unrouted)
  Top 0.305: U1.3 80.31,10.46 | 80.31,10.46 80.31,11.1 | 80.31,10.46 80.31,4.12 80.31,3.96
  Top 0.61: R10.1 47.22,21.11 C2.2 | C2.2 C3.2 51.66,21.03 51.89,21.26 51.89,29.03 52.38,29.52 | IC5.3 39.04,38.41 37.77,39.68 v36.5,39.68 35.38,39.68 34.11,40.95 R15.1 30.55,38.02 C7.2 C14.2 | v53.64,39.04 48.56,39.04 | T3.2 48.39,38.87 48.56,39.04 | 51.74,28.88 50.32,27.46 R26.1 50,27.29 | IC7.7 IC7.8 | 62.69,39.83 62.53,39.68 | IC7.8 68.25,25.07 | 52.38,29.52 | 52.38,29.52 51.74,28.88 | 51.74,28.88 | C2.2 45.5,19.24 | 45.5,19.24 43.08,16.82 v43.04,16.82 | IC7.9 70.79,34.49 v71.42,34.49 | C11.1 77.85,3.96 80.31,3.96 R42.2 84.61,3.96 v84.76,4.12 | v71.42,34.49 73.33,34.49 C21.2 73.41,32.21 R20.1 77.62,32.21 77.78,32.05 | 80.31,4.12 80.31,11.1 80.31,11.73 79.68,12.37 79.68,13.64 | 62.69,39.83 R29.1 61.82,39.91 C6.2 57.88,39.91 57.01,39.04 v57.01,35.87 57.01,34.15 51.74,28.88 | 62.69,39.83 R28.1 R27.1 R30.1 70.64,39.83 72.06,38.41 72.06,35.13 v71.42,34.49 | IC2.4 79.68,13.64 | 44.12,39.04 C12.2 44.1,36.71 IC5.1 | 44.12,39.04 44.12,39.68 R3.1 | 48.56,39.04 44.12,39.04 | PAD23.1 45.5,19.24 | R31.2 R23.1 91.26,38.33 C19.1 91.34,40.72 v91.11,40.95 | IC1.4 86.66,30.79 85.39,32.05 82.22,32.05 81.59,32.69 81.59,33.96 79.68,33.96 79.67,33.95 77.79,33.95 77.78,33.94 77.78,32.05 | 70.31,23.32 R37.1 70.31,25.22 | v72.06,26.98 70.31,25.22 | 70.31,25.22 68.84,25.22 IC7.8 | R24.1 81.43,13.64 79.68,13.64 | 77.78,32.05 77.78,28.09 78.41,27.46 R18.1 81.59,25.55 XR1.E 81.59,23.25 81.99,22.85 | C10.2 71.53,34.59 v71.42,34.49
  Bottom 0.61: PAD2.1 33.32,39.04 33.96,39.68 v36.5,39.68 38.41,41.58 39.67,41.58 | U3.39 58.7,19.36 | 53.64,41.58 51.62,41.58 50.81,42.39 47.3,42.39 | 47.3,42.39 41.24,42.39 40.43,41.58 39.67,41.58 | v53.64,39.04 53.64,41.58 | U3.39 59.42,20.62 54.91,20.62 52.19,17.91 52.19,12.37 | 52.19,12.37 U3.38 | U3.39 59.73,20.36 59.99,20.62 59.99,23.17 61.9,25.07 U3.15 72.06,25.07 | 52.19,12.37 47.93,12.37 44.98,9.43 C1.2 44.98,3.61 44.84,3.47 PAD16.1 PAD5.1 | 72.06,25.07 v72.06,26.98 72.06,27.61 73.97,29.52 73.97,32.69 | U3.1 50.89,26.55 | 50.89,26.55 46.66,22.32 46.66,19.99 43.48,16.82 v43.04,16.82 40.31,16.82 C13.- 39.39,17.17 39.32,16.94 39.32,14.57 IC8.1 | v53.64,39.04 56.82,35.87 v57.01,35.87 | 73.97,35.87 74.52,35.31 78.31,35.31 81.5,38.49 84.67,38.49 86.98,36.18 90.47,36.18 | 73.97,35.87 72.06,37.77 72.06,40.31 C16.2 | C15.2 58.32,41.58 53.64,41.58 | PAD26.1 73.97,32.69 | T4.2 77.78,9.34 77.78,1.57 82.85,1.57 | 91.75,40.31 v91.11,40.95 92.38,39.68 92.38,35.87 | 84.76,1.57 91.75,1.57 91.75,4.12 90.47,5.38 89.2,5.38 86.03,8.56 86.03,12.37 92.38,18.72 92.38,35.87 | 84.76,1.57 82.85,1.57 | v84.76,4.12 84.76,1.57 | C22.2 82.85,1.57 | U$1.5 47.33,42.36 47.3,42.39 | C23.2 C24.2 C25.2 90.47,36.18 | 92.38,35.87 92.06,36.18 90.47,36.18 | v53.64,39.04 51.1,39.04 50.62,38.56 R32.2 | D5.C 39.67,41.58 | 50.89,26.55 47.7,29.75 C5.2 C26.2 | 72.16,34.49 v71.42,34.49 73.86,34.49 73.97,34.59 | 73.97,32.69 73.97,34.59 | 73.97,34.59 73.97,35.87 | 72.06,25.07 73.97,25.07 77.14,21.9 77.14,19.36 77.92,19.36 T5.2
GND1  (via drill 0.6 pad 1.3)  (1 unrouted)
  Top 0.61: PAD30.1 164.13,39.04 163.5,39.68 v160.96,39.68 159.06,41.58 157.79,41.58 | U2.39 138.76,19.36 | 143.81,41.58 145.84,41.58 146.65,42.39 150.16,42.39 | 150.16,42.39 156.22,42.39 157.03,41.58 157.79,41.58 | v143.81,39.04 143.81,41.58 | U2.39 138.03,20.62 142.55,20.62 145.26,17.91 145.26,12.37 | 145.26,12.37 U2.38 | U2.39 137.74,20.36 137.47,20.62 137.47,23.17 135.56,25.07 U2.15 125.4,25.07 | 145.26,12.37 149.53,12.37 152.47,9.43 C30.2 152.47,3.61 152.62,3.47 PAD41.1 PAD33.1 | 125.4,25.07 v125.4,26.98 125.4,27.61 123.5,29.52 123.5,32.69 | U2.1 146.57,26.55 | 146.57,26.55 150.8,22.32 150.8,19.99 153.98,16.82 v154.42,16.82 157.15,16.82 C37.- 158.06,17.17 158.14,16.94 158.14,14.57 IC6.1 | v143.81,39.04 140.64,35.87 v140.45,35.87 | 123.5,35.87 122.94,35.31 119.14,35.31 115.96,38.49 112.79,38.49 110.48,36.18 106.98,36.18 | 123.5,35.87 125.4,37.77 125.4,40.31 C42.2 | C41.2 139.14,41.58 143.81,41.58 | PAD52.1 123.5,32.69 | T9.2 119.69,9.34 119.69,1.57 114.61,1.57 | 105.72,40.31 v106.35,40.95 105.08,39.68 105.08,35.87 | 112.7,1.57 105.72,1.57 105.72,4.12 106.98,5.38 108.25,5.38 111.43,8.56 111.43,12.37 105.08,18.72 105.08,35.87 | 112.7,1.57 114.61,1.57 | v112.7,4.12 112.7,1.57 | C48.2 114.61,1.57 | U$2.5 150.13,42.36 150.16,42.39 | C49.2 C50.2 C51.2 106.98,36.18 | 105.08,35.87 105.4,36.18 106.98,36.18 | v143.81,39.04 146.36,39.04 146.84,38.56 R82.2 | D8.C 157.79,41.58 | 146.57,26.55 149.76,29.75 C34.2 C52.2 | 125.3,34.49 v126.03,34.49 123.6,34.49 123.5,34.59 | 123.5,32.69 123.5,34.59 | 123.5,34.59 123.5,35.87 | 125.4,25.07 123.5,25.07 120.32,21.9 120.32,19.36 119.53,19.36 T10.2
  Bottom 0.305: U4.3 117.14,10.46 | 117.14,10.46 117.14,11.1 | 117.14,10.46 117.14,4.12 117.14,3.96
  Bottom 0.61: R33.1 150.24,21.11 C27.2 | C27.2 C31.2 145.8,21.03 145.57,21.26 145.57,29.03 145.08,29.52 | IC3.3 158.42,38.41 159.69,39.68 v160.96,39.68 162.08,39.68 163.35,40.95 R46.1 166.9,38.02 C38.2 C39.2 | v143.81,39.04 148.89,39.04 | T8.2 149.06,38.87 148.89,39.04 | 145.72,28.88 147.14,27.46 R51.1 147.46,27.29 | IC4.7 IC4.8 | 134.77,39.83 134.93,39.68 | IC4.8 129.21,25.07 | 145.08,29.52 | 145.08,29.52 145.72,28.88 | 145.72,28.88 | C27.2 151.95,19.24 | 151.95,19.24 154.38,16.82 v154.42,16.82 | IC4.9 126.67,34.49 v126.03,34.49 | C32.1 119.61,3.96 117.14,3.96 R68.2 112.85,3.96 v112.7,4.12 | v126.03,34.49 124.13,34.49 C47.2 124.05,32.21 R77.1 119.84,32.21 119.69,32.05 | 117.14,4.12 117.14,11.1 117.14,11.73 117.78,12.37 117.78,13.64 | 134.77,39.83 R54.1 135.64,39.91 C35.2 139.58,39.91 140.45,39.04 v140.45,35.87 140.45,34.15 145.72,28.88 | 134.77,39.83 R53.1 R52.1 R56.1 126.82,39.83 125.4,38.41 125.4,35.13 v126.03,34.49 | IC10.4 117.78,13.64 | 153.34,39.04 C40.2 153.36,36.71 IC3.1 | 153.34,39.04 153.34,39.68 R55.1 | 148.89,39.04 153.34,39.04 | PAD49.1 151.95,19.24 | R81.2 R80.1 106.2,38.33 C45.1 106.12,40.72 v106.35,40.95 | IC9.4 110.8,30.79 112.06,32.05 115.24,32.05 115.88,32.69 115.88,33.96 115.89,33.95 119.67,33.95 119.69,33.94 119.69,32.05 | 127.15,23.32 R63.1 127.15,25.22 | v125.4,26.98 127.15,25.22 | 127.15,25.22 128.62,25.22 IC4.8 | R49.1 116.03,13.64 117.78,13.64 | 119.69,32.05 119.69,28.09 119.05,27.46 R73.1 115.88,25.55 XR2.E 115.88,23.25 115.47,22.85 | C36.2 125.93,34.59 v126.03,34.49
GND2
  Bottom 0.61: PAD57.1 7.29,23.8 7.29,23.17 6.65,22.53 R84.1 6.5,20.23 U$3.4 4.75,19.99 4.75,18.72 XR3.E 1.57,18.72 1.57,6.71 9.19,6.71 9.19,8.33 C53.2 C55.2 C56.2
IO0  (via drill 0.6 pad 1.3)
  Top 0.61: R8.2 54.91,9.83 56.19,8.56 63.17,8.56 | 63.17,8.56 65.71,8.56 66.34,7.93 v69.52,7.93 70.16,7.93 PAD22.1 | T1.3 63.17,8.56
  Bottom 0.61: v69.52,7.93 68.7,8.74 U3.25
IO1
  Top 0.61: U2.8 136.38,31.88 134.93,33.33 PAD44.1
IO2
  Top 0.61: U2.9 135.03,27.93 135.03,31.64 132.38,34.28 PAD42.1
IO3  (via drill 0.6 pad 1.3)
  Top 0.61: v127.94,7.93 128.75,8.74 U2.25
  Bottom 0.61: R71.2 142.55,9.83 141.27,8.56 134.29,8.56 | 134.29,8.56 131.75,8.56 131.12,7.93 v127.94,7.93 127.3,7.93 PAD48.1 | T6.3 134.29,8.56
IO4
  Top 0.61: U2.11 132.56,29.97 127.3,35.23 PAD43.1
IO5
  Top 0.61: U2.31 136.38,8.11 134.93,6.66 PAD55.1
IO6
  Top 0.61: U2.30 135.11,8.74 133.66,7.29 133.66,5.38 132.38,4.12 PAD54.1
IO7
  Top 0.61: U2.10 133.83,30.61 129.84,34.59 PAD53.1
IO18
  Bottom 0.61: U3.30 62.35,8.74 63.8,7.29 63.8,5.38 65.07,4.12 PAD28.1
IO19
  Bottom 0.61: U3.31 61.09,8.11 62.53,6.66 PAD29.1
IO25
  Bottom 0.61: U3.10 63.62,30.61 67.61,34.59 PAD27.1
IO26
  Bottom 0.61: U3.11 64.89,29.97 70.16,35.23 PAD17.1
IO32
  Bottom 0.61: U3.8 61.09,31.88 62.53,33.33 PAD18.1
IO33
  Bottom 0.61: U3.9 62.43,27.93 62.43,31.64 65.07,34.28 PAD14.1
IR1_LED_ANODE
  Bottom 0.61: R6.1 PAD8.1
IR1_LED_ANODE1
  Top 0.61: R60.1 PAD36.1
IR1_LED_ANODE2
  Bottom 0.61: XR3.A 3.04,25.51 PAD60.1
IR1_LED_CATHODE
  Bottom 0.61: PAD7.1 T4.3
IR1_LED_CATHODE1
  Top 0.61: PAD35.1 T9.3
IR1_LED_CATHODE2
  Bottom 0.61: PAD59.1 4.75,24.44 4.75,21.9 4.11,21.26 XR3.CATH
IR2_LED_ANODE
  Bottom 0.61: R4.2 85.55,26.98 78.41,26.98 77.78,26.34 XR1.A
IR2_LED_ANODE1
  Top 0.61: R58.2 111.91,26.98 119.05,26.98 119.69,26.34 XR2.A
IR2_LED_CATHODE  (via drill 0.6 pad 1.3)
  Top 0.61: v80.31,22.53 80.31,23.6 XR1.CATH
  Bottom 0.61: T5.3 79.85,22.53 v80.31,22.53
IR2_LED_CATHODE1  (via drill 0.6 pad 1.3)
  Top 0.61: T10.3 117.61,22.53 v117.14,22.53
  Bottom 0.61: v117.14,22.53 117.14,23.6 XR2.CATH
N$1
  Bottom 0.61: R40.1 40.16,36.65 39.67,37.14 D5.A
N$2
  Top 0.61: D4.C R39.1
N$3
  Bottom 0.61: T5.1 80,17.77 79.68,17.45 75.23,17.45 74.6,18.09 R7.2
N$4
  Top 0.61: D3.C R38.1
N$5
  Top 0.61: R11.2 63.5,11.58 T1.1
N$6
  Top 0.61: IC2.5 79.89,19.84 R1.2 81.77,19.84 83.19,21.26 86.03,21.26 87.3,19.99 C17.1
N$7
  Bottom 0.61: T8.1 146.52,33.65 R36.2
N$8
  Bottom 0.61: T4.1 73.33,8.71 R9.2
N$9
  Top 0.305: U1.1 81.73,8.41 82.85,7.29 R42.1
N$10  (1 unrouted)
  Top 0.61: 85.39,30.15 84.76,30.79 79.68,30.79 | R18.2 79.68,30.79 | 79.68,30.79 R19.1
N$11
  Top 0.61: IC7.6 65.71,23.8 66.98,22.53 R37.2
N$12
  Top 0.61: C18.2 73.18,24.99 R17.1 73.33,22.38 73.33,19.99 75.23,18.09 77.14,18.09 | 77.14,18.09 IC2.7 | C8.2 84.12,18.95 84.12,18.72 83.49,18.09 77.14,18.09
N$13
  Top 0.61: T3.1 50.94,33.65 R13.2
N$14
  Top 0.61: R20.2 76.1,29.13 C18.1 76.02,24.99 R17.2 77.78,22.53 78.41,21.9 IC2.6
N$15
  Top 0.61: R23.2 87.78,36.5 86.03,36.5 85.55,36.98 R21.1 85.39,36.98 IC1.6
N$16
  Top 0.61: C20.1 90.7,31.42 90.32,31.42 R31.1 87.36,33.33 IC1.5
N$17
  Top 0.61: R22.1 R21.2 82.7,38.41 82.85,38.41 84.12,37.14 IC1.7
N$18
  Top 0.61: T2.1 59.38,14.45 R2.2
N$19
  Bottom 0.61: R34.2 133.96,11.58 T6.1
N$20
  Bottom 0.61: T7.1 138.08,14.45 R48.2
N$21
  Bottom 0.61: C28.1 115.62,16.59 R49.2 116.36,16.82 118.41,16.82 119.05,16.18 IC10.3
N$23
  Bottom 0.61: 135.56,22.68 135,22.68 C29.1 134.69,22.53 133.66,22.53 130.48,19.36 125.4,19.36 122.86,16.82 120.95,16.82 120.32,16.18 IC10.2 | 135.56,22.68 R50.2 | IC4.3 135.56,22.68
N$24
  Bottom 0.61: IC4.13 134.29,33.6 132.66,35.23 130.48,35.23 R52.2
N$25
  Bottom 0.61: IC4.14 135.56,33.98 133.02,36.52 R53.2
N$26
  Bottom 0.61: IC4.15 136.83,34.59 135.56,35.87 R54.2
N$27
  Bottom 0.61: IC4.12 133.02,33.33 132.38,33.96 129.84,33.96 127.94,35.87 R56.2
N$28
  Bottom 0.61: IC4.6 131.75,23.8 130.48,22.53 R63.2
N$29
  Top 0.61: C8.1 81.84,16.59 R24.2 81.1,16.82 79.05,16.82 78.41,16.18 IC2.3
N$30
  Top 0.61: R66.1 157.3,36.65 157.79,37.14 D8.A
N$31
  Bottom 0.305: U4.1 115.73,8.41 114.61,7.29 R68.1
N$32
  Top 0.61: T9.1 124.13,8.71 R62.2
N$33
  Top 0.61: T10.1 117.47,17.77 117.78,17.45 122.22,17.45 122.86,18.09 R61.2
N$34
  Bottom 0.61: R73.2 117.78,30.79 | 117.78,30.79 R74.1 | 117.78,30.79 112.7,30.79 112.06,30.15 IC9.3
N$35
  Bottom 0.61: D7.C R65.1
N$36
  Bottom 0.61: D6.C R64.1
N$37
  Bottom 0.61: IC10.5 117.57,19.84 R75.2 115.69,19.84 114.27,21.26 111.43,21.26 110.16,19.99 C43.1
N$38
  Bottom 0.61: C44.2 124.28,24.99 R76.1 124.13,22.38 124.13,19.99 122.22,18.09 120.32,18.09 | 120.32,18.09 IC10.7 | C28.2 113.33,18.95 113.33,18.72 113.97,18.09 120.32,18.09
N$39
  Top 0.61: 61.9,22.68 62.46,22.68 C9.1 62.77,22.53 63.8,22.53 66.98,19.36 72.06,19.36 74.6,16.82 76.5,16.82 77.14,16.18 IC2.2 | 61.9,22.68 R25.2 | IC7.3 61.9,22.68
N$40
  Top 0.61: IC7.13 63.17,33.6 64.8,35.23 66.98,35.23 R27.2
N$41
  Top 0.61: IC7.14 61.9,33.98 64.44,36.52 R28.2
N$42
  Top 0.61: IC7.15 60.63,34.59 61.9,35.87 R29.2
N$43
  Top 0.61: IC7.12 64.44,33.33 65.07,33.96 67.61,33.96 69.52,35.87 R30.2
N$44
  Bottom 0.61: R77.2 121.36,29.13 C44.1 121.44,24.99 R76.2 119.69,22.53 119.05,21.9 IC10.6
N$45
  Bottom 0.61: R80.2 109.68,36.5 111.43,36.5 111.91,36.98 R78.1 112.06,36.98 IC9.6
N$46
  Bottom 0.61: C46.1 106.75,31.42 107.14,31.42 R81.1 110.1,33.33 IC9.5
N$47
  Bottom 0.61: R79.1 R78.2 114.76,38.41 114.61,38.41 113.33,37.14 IC9.7
N$49
  Bottom 0.61: R85.1 R84.2 9.35,19.51 8.56,18.72 U$3.3
PHOTO_TRANS_COLLECTOR
  Top 0.61: 84.12,25.86 R12.1 86.11,25.94 C4.1 | IC1.2 84.12,25.86 | 84.12,25.86 82.85,24.59 XR1.COLL
PHOTO_TRANS_COLLECTOR1
  Bottom 0.61: 113.33,25.86 R72.1 111.35,25.94 C33.1 | IC9.2 113.33,25.86 | 113.33,25.86 114.61,24.59 XR2.COLL
PHOTO_TRANS_COLLECTOR2
  Bottom 0.61: U$3.2 XR3.COLL 3.04,13.92 R83.1 3.33,11.18 C54.1
PHOTODIODE_1_ADC  (via drill 0.6 pad 1.3)
  Top 0.305: 83.49,11.73 82.85,11.73 82.59,11.46 U1.5
  Top 0.61: C4.2 87.88,22.95 | 87.88,22.95 85.47,22.94 R12.2 | C20.2 88.34,28.48 v88.57,28.25 89.84,28.25 89.84,23.17 | 89.84,23.17 89.62,22.95 87.88,22.95 | v81.59,28.88 81.64,28.82 IC1.1 | 89.84,23.17 89.84,18.72 88.14,17.02 87.73,17.02 C17.2 | C17.2 87.07,16.59 86.66,16.18 C17.2 | 83.49,11.73 84.12,11.73 84.44,12.05 84.44,13.32 87.3,16.18 C17.2
  Bottom 0.61: v88.57,28.25 87.94,28.88 v81.59,28.88
PHOTODIODE_1_ADC1  (via drill 0.6 pad 1.3)
  Top 0.61: v108.89,28.25 109.52,28.88 v115.88,28.88
  Bottom 0.305: 113.97,11.73 114.61,11.73 114.88,11.46 U4.5
  Bottom 0.61: C33.2 109.58,22.95 | 109.58,22.95 111.99,22.94 R72.2 | C46.2 109.12,28.48 v108.89,28.25 107.62,28.25 107.62,23.17 | 107.62,23.17 107.84,22.95 109.58,22.95 | v115.88,28.88 115.81,28.82 IC9.1 | 107.62,23.17 107.62,18.72 109.32,17.02 109.73,17.02 C43.2 | C43.2 110.39,16.59 110.8,16.18 C43.2 | 113.97,11.73 113.33,11.73 113.02,12.05 113.02,13.32 110.16,16.18 C43.2
PHOTODIODE_2_ADC
  Top 0.305: U1.7 75.37,10.96 75.23,11.1
  Top 0.61: 75.23,11.1 PAD9.1
PHOTODIODE_2_ADC1
  Bottom 0.305: U4.7 122.09,10.96 122.22,11.1
  Bottom 0.61: 122.22,11.1 PAD56.1
PHOTODIODE_2_ADC2
  Bottom 0.61: PAD61.1 5.38,8.56 6.25,9.43 C54.2 6.17,11.18 R83.2 9.19,16.66 | 9.19,16.66 9.19,17.45 10.46,18.72 U$3.6 | 9.19,16.66
PPG_SIGNAL_1_ADC
  Top 0.305: U1.6 76.78,11.46 76.5,11.73
  Top 0.61: R25.1 59.44,19.76 C9.2 64.03,19.76 65.71,18.09 71.01,18.09 75.34,13.75 | IC2.1 75.34,14.32 75.34,13.75 | 76.5,11.73 76.5,12.59 75.34,13.75
PPG_SIGNAL_1_ADC1
  Bottom 0.305: U4.6 120.69,11.46 120.95,11.73
  Bottom 0.61: R50.1 138.02,19.76 C29.2 133.43,19.76 131.75,18.09 126.45,18.09 122.11,13.75 | IC10.1 122.11,14.32 122.11,13.75 | 120.95,11.73 120.95,12.59 122.11,13.75
PPG_SIGNAL_2_ADC
  Top 0.305: U1.4 82.53,10.96 82.78,10.71 83.49,10.71
  Top 0.61: C19.2 88.34,41.58 | 88.34,41.58 88.34,42.47 88.67,42.8 92.96,42.8 92.96,19.3 86.11,12.45 86.11,11.81 85.01,10.71 83.49,10.71 | R22.2 88.34,41.58
PPG_SIGNAL_2_ADC1
  Bottom 0.305: U4.4 114.93,10.96 114.68,10.71 113.97,10.71
  Bottom 0.61: C45.2 109.12,41.58 | 109.12,41.58 109.12,42.47 108.79,42.8 104.5,42.8 104.5,19.3 111.35,12.45 111.35,11.81 112.45,10.71 113.97,10.71 | R79.2 109.12,41.58
PPG_SIGNAL_GAIN_A  (via drill 0.6 pad 1.3)
  Top 0.61: IC7.11 65.71,28.88 69.98,28.88 71.21,30.11 v71.42,30.11
  Bottom 0.61: v71.42,30.11 68.21,30.11 67.44,29.34 U3.13
PPG_SIGNAL_GAIN_A1  (via drill 0.6 pad 1.3)
  Top 0.61: v126.03,30.11 129.25,30.11 130.02,29.34 U2.13
  Bottom 0.61: IC4.11 131.75,28.88 127.48,28.88 126.25,30.11 v126.03,30.11
PPG_SIGNAL_GAIN_B  (via drill 0.6 pad 1.3)
  Top 0.61: IC7.10 67.11,31.83 67.11,30.6 67.07,30 68.88,30 71.42,32.54 v71.42,32.69
  Bottom 0.61: U3.12 66.16,29.52 69.34,32.69 v71.42,32.69
PPG_SIGNAL_GAIN_B1  (via drill 0.6 pad 1.3)
  Top 0.61: U2.12 131.3,29.52 128.12,32.69 v126.03,32.69
  Bottom 0.61: v126.03,32.69 126.03,32.54 128.57,30 130.38,30 130.48,30.09 IC4.10
R_PROG
  Top 0.61: IC5.2 40.31,39.19 R3.2
R_PROG1
  Bottom 0.61: IC3.2 157.15,39.19 R55.2
RTS
  Top 0.61: T2.2 63.5,14.43 R11.1 67.77,14.43 68.25,13.94 PAD15.1
RTS1
  Bottom 0.61: T7.2 133.96,14.43 R34.1 129.69,14.43 129.21,13.94 PAD40.1
SCL  (via drill 0.6 pad 1.3)
  Top 0.305: U1.10 76.93,8.77 | 75.34,7.18 73.51,5.34
  Top 0.61: R43.1 50.47,9.85 51.38,8.94 51.38,8.92 v53.64,6.66 53.64,6.02 54.91,4.75 72.91,4.75 75.34,7.18 76.93,8.77
  Bottom 0.61: PAD3.1 52.68,3.25 52.38,3.56 52.38,5.38 v53.64,6.66 54.73,7.74 U3.36
SCL1  (via drill 0.6 pad 1.3)
  Top 0.61: PAD31.1 144.78,3.25 145.08,3.56 145.08,5.38 v143.81,6.66 142.72,7.74 U2.36
  Bottom 0.305: U4.10 120.53,8.77 | 122.11,7.18 123.95,5.34
  Bottom 0.61: R69.1 146.99,9.85 146.08,8.94 146.08,8.92 v143.81,6.66 143.81,6.02 142.55,4.75 124.55,4.75 122.11,7.18 120.53,8.77
SDA  (via drill 0.6 pad 1.3)
  Top 0.305: U1.9 76.5,9.96
  Top 0.61: v59.36,6.46 59.36,6.66 | v59.36,6.46 56.38,6.46 53.01,9.83 R44.1 | 76.5,9.96 73,6.46 v59.36,6.46
  Bottom 0.61: U3.33 58.55,8.56 59.99,7.11 59.99,6.66 | 59.99,6.66 PAD4.1 | v59.36,6.46 59.55,6.66 59.99,6.66
SDA1  (via drill 0.6 pad 1.3)
  Top 0.61: U2.33 138.91,8.56 137.47,7.11 137.47,6.66 | 137.47,6.66 PAD32.1 | v138.1,6.46 137.91,6.66 137.47,6.66
  Bottom 0.305: U4.9 120.95,9.96
  Bottom 0.61: v138.1,6.46 138.1,6.66 | v138.1,6.46 141.08,6.46 144.45,9.83 R70.1 | 120.95,9.96 124.46,6.46 v138.1,6.46
V_BATT  (via drill 0.6 pad 1.3)
  Top 0.61: R16.2 33.48,29.67 v32.69,28.88 | IC5.5 37.56,31.42 R16.2 | C14.1 33.55,31.5 R16.2
  Bottom 0.61: PAD1.1 32.69,32.69 v32.69,28.88 32.05,28.25 32.05,23.84 Q5.3
V_BATT1  (via drill 0.6 pad 1.3)
  Top 0.61: PAD10.1 164.77,32.69 v164.77,28.88 165.4,28.25 165.4,23.84 Q1.3
  Bottom 0.61: R47.2 163.98,29.67 v164.77,28.88 | IC3.5 159.9,31.42 R47.2 | C39.1 163.9,31.5 R47.2
V_BATT_ADC  (via drill 0.6 pad 1.3)
  Top 0.61: R16.1 29.51,31.42 28.24,32.69 28.24,39.68 29.51,40.95 R15.2 30.63,40.95 30.78,41.1 30.78,42.8 61.27,42.8 v61.27,42.45
  Bottom 0.61: U3.7 59.81,33.33 60.63,34.14 60.63,39.91 C16.1 61.03,42.22 v61.27,42.45
V_BATT_ADC1  (via drill 0.6 pad 1.3)
  Top 0.61: U2.7 137.64,33.33 136.83,34.14 136.83,39.91 C42.1 136.43,42.22 v136.19,42.45
  Bottom 0.61: R47.1 167.94,31.42 169.21,32.69 169.21,39.68 167.94,40.95 R46.2 166.83,40.95 166.68,41.1 166.68,42.8 136.19,42.8 v136.19,42.45
V_USB  (via drill 0.6 pad 1.3)
  Top 0.61: R14.1 R35.2 | R14.1 R10.2 47.22,23.95 C2.1 C3.1 | v42.22,27.61 42.37,27.46 R14.1 | v28.24,29.52 28.24,19.36 | C7.1 35.86,37.77 | 35.86,37.77 36.71,37.77 IC5.4 | v35.86,35.23 35.86,37.77 | 28.24,19.36 31.82,19.36 D4.A D3.A | 28.24,19.36 28.24,12.83 36.33,4.75 37.77,4.75 38.41,5.38 v41.58,5.38
  Bottom 0.61: 41.57,26.08 D1.A 42.22,25.71 | 41.57,26.08 Q5.1 | 42.22,25.71 v42.22,27.61 42.22,29.63 37.89,33.96 | 41.57,26.08 41.84,26.08 42.22,25.71 | v28.24,29.52 27.67,30.09 27.67,35.29 28.24,35.87 35.23,35.87 v35.86,35.23 37.13,33.96 37.89,33.96 | U$1.1 44.72,37.14 44.09,36.5 R40.2 42.85,36.35 42.85,34.59 42.22,33.96 37.89,33.96 | v41.58,5.38 42.22,4.75 PAD25.1
V_USB1  (via drill 0.6 pad 1.3)
  Top 0.61: 155.89,26.08 D2.A 155.25,25.71 | 155.89,26.08 Q1.1 | 155.25,25.71 v155.25,27.61 155.25,29.63 159.57,33.96 | 155.89,26.08 155.62,26.08 155.25,25.71 | v169.21,29.52 169.79,30.09 169.79,35.29 169.21,35.87 162.23,35.87 v161.59,35.23 160.32,33.96 159.57,33.96 | U$2.1 152.74,37.14 153.37,36.5 R66.2 154.61,36.35 154.61,34.59 155.25,33.96 159.57,33.96 | v155.88,5.38 155.25,4.75 PAD51.1
  Bottom 0.61: R45.1 R57.2 | R45.1 R33.2 150.24,23.95 C27.1 C31.1 | v155.25,27.61 155.09,27.46 R45.1 | v169.21,29.52 169.21,19.36 | C38.1 161.59,37.77 | 161.59,37.77 160.75,37.77 IC3.4 | v161.59,35.23 161.59,37.77 | 169.21,19.36 165.63,19.36 D7.A D6.A | 169.21,19.36 169.21,12.83 161.13,4.75 159.69,4.75 159.06,5.38 v155.88,5.38
V_USB_ADC  (via drill 0.6 pad 1.3)
  Top 0.61: R35.1 R26.2 51.26,30.3 55.55,34.59 v55.55,39.68
  Bottom 0.61: U3.6 58.55,37.77 | C15.1 58.77,37.54 58.55,37.77 | 58.55,37.77 56.64,39.68 v55.55,39.68
V_USB_ADC1  (via drill 0.6 pad 1.3)
  Top 0.61: U2.6 138.91,37.77 | C41.1 138.69,37.54 138.91,37.77 | 138.91,37.77 140.82,39.68 v141.91,39.68
  Bottom 0.61: R57.1 R51.2 146.2,30.3 141.91,34.59 v141.91,39.68
VIN
  Bottom 0.61: IC8.2 39.02,7.93 | 39.02,7.93 C1.1 41.77,7.71 | PAD20.1 39.02,2.86 39.02,7.93
VIN1
  Top 0.61: IC6.2 158.44,7.93 | 158.44,7.93 C30.1 155.69,7.71 | PAD46.1 158.44,2.86 158.44,7.93
VIN_SW  (via drill 0.6 pad 1.3)
  Top 0.61: v30.15,17.45 30.15,16.18 37.13,9.2 v37.13,6.66
  Bottom 0.61: 39.3,21.52 Q5.2 | Q5.2 38.66,21.52 37.13,19.99 30.78,19.99 30.15,19.36 v30.15,17.45 | PAD19.1 36.6,3.46 36.5,3.57 36.5,5.38 37.13,6.02 v37.13,6.66 | D1.C 42.22,21.9 41.84,21.52 Q5.2
VIN_SW1  (via drill 0.6 pad 1.3)
  Top 0.61: 158.16,21.52 Q1.2 | Q1.2 158.8,21.52 160.32,19.99 166.68,19.99 167.31,19.36 v167.31,17.45 | PAD45.1 160.86,3.46 160.96,3.57 160.96,5.38 160.32,6.02 v160.32,6.66 | D2.C 155.25,21.9 155.62,21.52 Q1.2
  Bottom 0.61: v167.31,17.45 167.31,16.18 160.32,9.2 v160.32,6.66
(copper drawn outside any net)
  shapes: Bottom circle x16, Top area x4, Top circle x12

## Text on the board
Top: NIRGM / V8
Bottom: NIRGM / V8